# EAGLE board oven_redux (EAGLE 9.5.1)

Size 160 x 100 mm. Coordinates in mm from the lower left corner, seen from the top.
Outline: 0,0 160,0 160,100 0,100 0,0
Copper layers (1*16): Top 0.035mm / dielectric 1.5mm / Bottom 0.035mm
Design rules "default": minimum track width 6mil, minimum drill 0.35mm, track to track 6mil, track to pad 6mil, pad to pad 6mil, via to via 6mil, smd to smd 6mil, copper to edge 40mil, drill to drill 6mil, minimum pad ring 10mil, minimum via ring 8mil, stop-mask expansion 4mil, vias tented up to drill 0mil, thermal gap 10mil

## Footprints (pad centres in the part's own frame; a part is rotated, then mirrored left to right if it is on the bottom)
C025-050X050 = drill 0.813 octagon: 1 -1.27,0; 2 1.27,0
DO41-10 = drill 1.118: A 5.08,0; C -5.08,0
3,3 = hole 3.3: 0,0
1X04 = drill 1.016 long: 1 -3.81,0; 2 -1.27,0; 3 1.27,0; 4 3.81,0
1X08 = drill 1.016 long: 1 -8.89,0; 2 -6.35,0; 3 -3.81,0; 4 -1.27,0; 5 1.27,0; 6 3.81,0; 7 6.35,0; 8 8.89,0
ARDUINO-NANO-3.0 = drill 1 square: J1.1 17.78,7.62 | drill 1: J1.2 15.24,7.62; J1.3 12.7,7.62; J1.4 10.16,7.62; J1.5 7.62,7.62; J1.6 5.08,7.62; J1.7 2.54,7.62; J1.8 0,7.62; J1.9 -2.54,7.62; J1.10 -5.08,7.62; J1.11 -7.62,7.62; J1.12 -10.16,7.62; J1.13 -12.7,7.62; J1.14 -15.24,7.62; J1.15 -17.78,7.62; J2.1 17.78,-7.62; J2.2 15.24,-7.62; J2.3 12.7,-7.62; J2.4 10.16,-7.62; J2.5 7.62,-7.62; J2.6 5.08,-7.62; J2.7 2.54,-7.62; J2.8 0,-7.62; J2.9 -2.54,-7.62; J2.10 -5.08,-7.62; J2.11 -7.62,-7.62; J2.12 -10.16,-7.62; J2.13 -12.7,-7.62; J2.14 -15.24,-7.62; J2.15 -17.78,-7.62 | hole 1.651: -20.32,7.62; -20.32,-7.62; 20.32,-7.62; 20.32,7.62
THERMOCOUPLE-MAX6675 = drill 1: CS 12.7,2.54; GND 12.7,-5.08; SCK 12.7,0; VCC 12.7,-2.54 | drill 1 square: SO 12.7,5.08 | hole 3.2: 0,0
0204/7 = drill 0.813 octagon: 1 -3.81,0; 2 3.81,0
317TL = drill 1.016 long: 1 -2.54,-3.81; 2 0,-3.81; 3 2.54,-3.81 | hole 3.302: 0,11.176
MKDSN1,5/2-5,08 = drill 1.3 pad 2: 1 -2.561,0.025; 2 2.519,0.025

## Placement (x,y rotation side)
C1  0u1  [C025-050X050]  -43.18,50.8 0 top  (outside the outline)
C2  1u  [C025-050X050]  -49.53,50.8 0 top  (outside the outline)
C3  1u  [C025-050X050]  -55.88,50.8 0 top  (outside the outline)
D1  1N4004  [DO41-10]  -53.34,60.96 0 top  (outside the outline)
H1  MOUNT-HOLE3.3  [3,3]  -54.61,-5.08 0 top  (outside the outline)
H2  MOUNT-HOLE3.3  [3,3]  -54.61,-13.97 0 top  (outside the outline)
H3  MOUNT-HOLE3.3  [3,3]  -54.61,-22.86 0 top  (outside the outline)
H4  MOUNT-HOLE3.3  [3,3]  -54.61,-31.75 0 top  (outside the outline)
JP1  DISP  [1X04]  -40.64,60.96 0 top  (outside the outline)
JP2  NUMPAD  [1X08]  -24.13,60.96 0 top  (outside the outline)
M1  ARDUINO-NANO-3.0  [ARDUINO-NANO-3.0]  -35.56,12.7 0 top  (outside the outline)
M2  THERMOCOUPLE-MAX6675  [THERMOCOUPLE-MAX6675]  -39.37,34.29 0 top  (outside the outline)
R1  1k  [0204/7]  -17.78,66.04 0 top  (outside the outline)
R2  3k1  [0204/7]  -27.94,66.04 0 top  (outside the outline)
R3  10k  [0204/7]  -38.1,66.04 0 top  (outside the outline)
U1  [317TL]  -19.05,30.48 0 top  (outside the outline)
X1  RELAY  [MKDSN1,5/2-5,08]  -20.32,50.8 0 top  (outside the outline)
X2  POWER  [MKDSN1,5/2-5,08]  -34.29,50.8 0 top  (outside the outline)

## Library data of the parts
C1-C3 = rcl; SPICEPREFIX: C
D1 = diode
H1-H4 = holes
JP1 JP2 = pinhead
M1 M2 = diy-modules
R1-R3 = rcl; SPICEPREFIX: R
U1 = v-reg
X1 X2 = con-phoenix-508

## Nets
3V3: M1.J2.14
+5V: C2.1 C3.1 JP1.4 M1.J2.4 M2.VCC R2.1 U1.2
GND: C1.2 C2.2 C3.2 JP1.1 M1.J1.4 M1.J2.2 M2.GND R1.2 R3.2 X1.1 X2.1
N$1: JP2.1 M1.J1.12
N$2: JP2.2 M1.J1.11
N$3: JP2.3 M1.J1.10
N$4: JP2.4 M1.J1.9
N$5: JP2.5 M1.J1.8
N$6: JP2.6 M1.J1.7
N$7: JP2.7 M1.J1.6
N$8: JP2.8 M1.J1.5
N$9: JP1.2 M1.J2.7
N$10: R1.1 R2.2 U1.1
N$11: C1.1 D1.C U1.3
N$12: D1.A X2.2
N$13: JP1.3 M1.J2.8
N$14: M1.J2.9 M2.SCK
N$15: M1.J2.10 M2.CS
N$16: M1.J1.13 R3.1 X1.2
N$17: M1.J2.11 M2.SO
VIN: M1.J2.1

## Tracks (layer width: path | path; a pad name or v marks a point on that pad's centre or on a via)
+5V  (6 unrouted)
GND  (10 unrouted)
N$1  (1 unrouted)
N$2  (1 unrouted)
N$3  (1 unrouted)
N$4  (1 unrouted)
N$5  (1 unrouted)
N$6  (1 unrouted)
N$7  (1 unrouted)
N$8  (1 unrouted)
N$9  (1 unrouted)
N$10  (2 unrouted)
N$11  (2 unrouted)
N$12  (1 unrouted)
N$13  (1 unrouted)
N$14  (1 unrouted)
N$15  (1 unrouted)
N$16  (2 unrouted)
N$17  (1 unrouted)